# EAGLE board GroundStationCR (EAGLE 7.7.0)
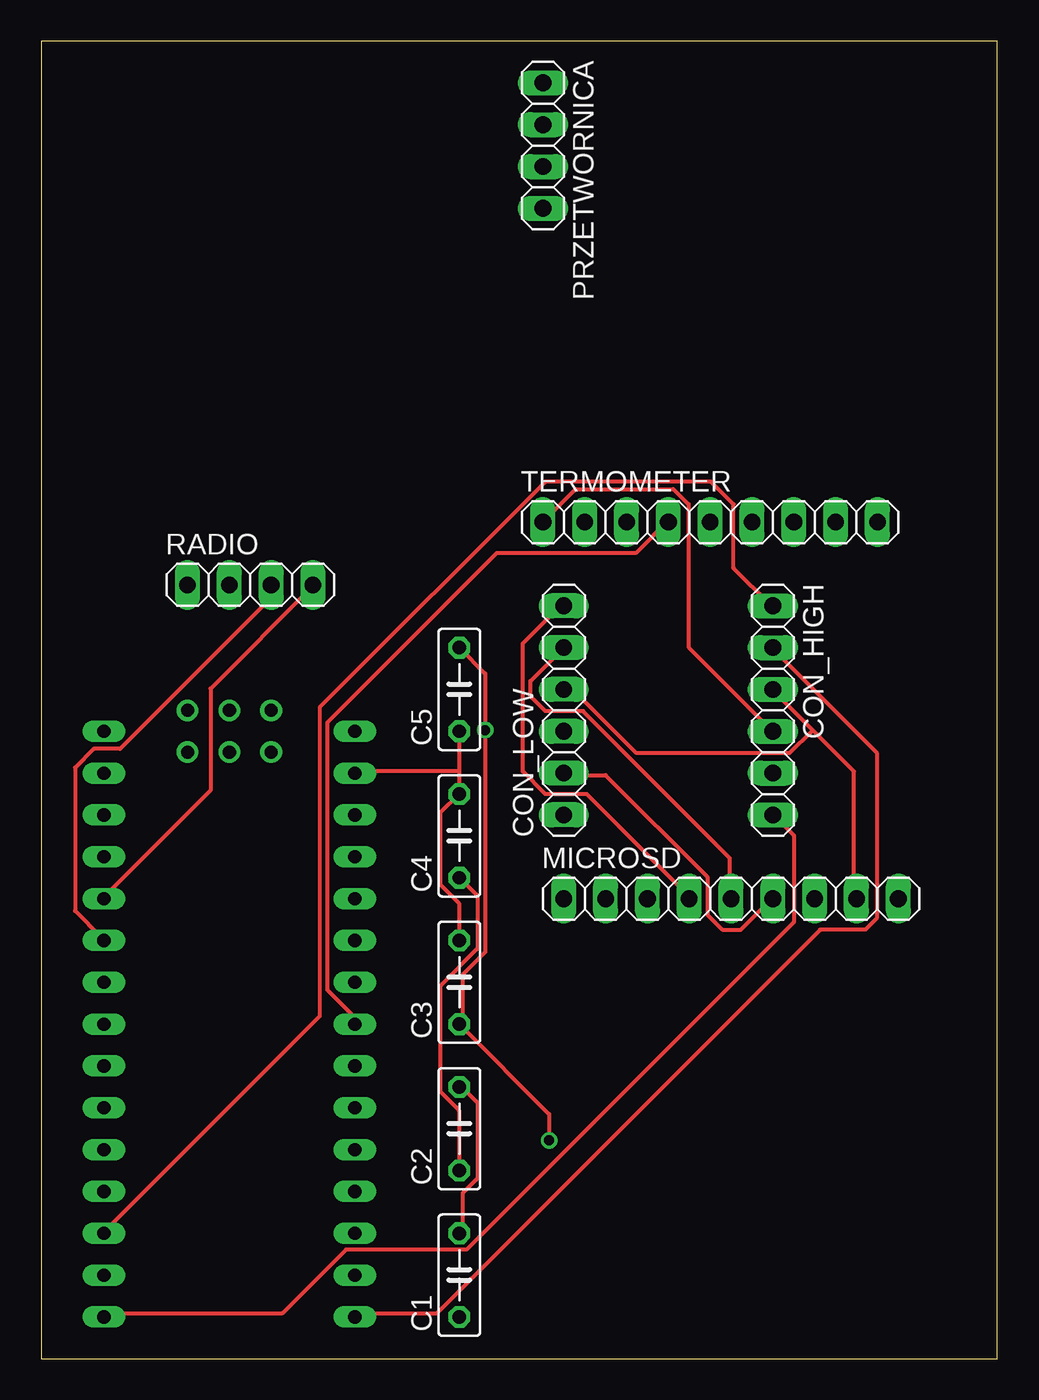
[diagram p0: board, top side]
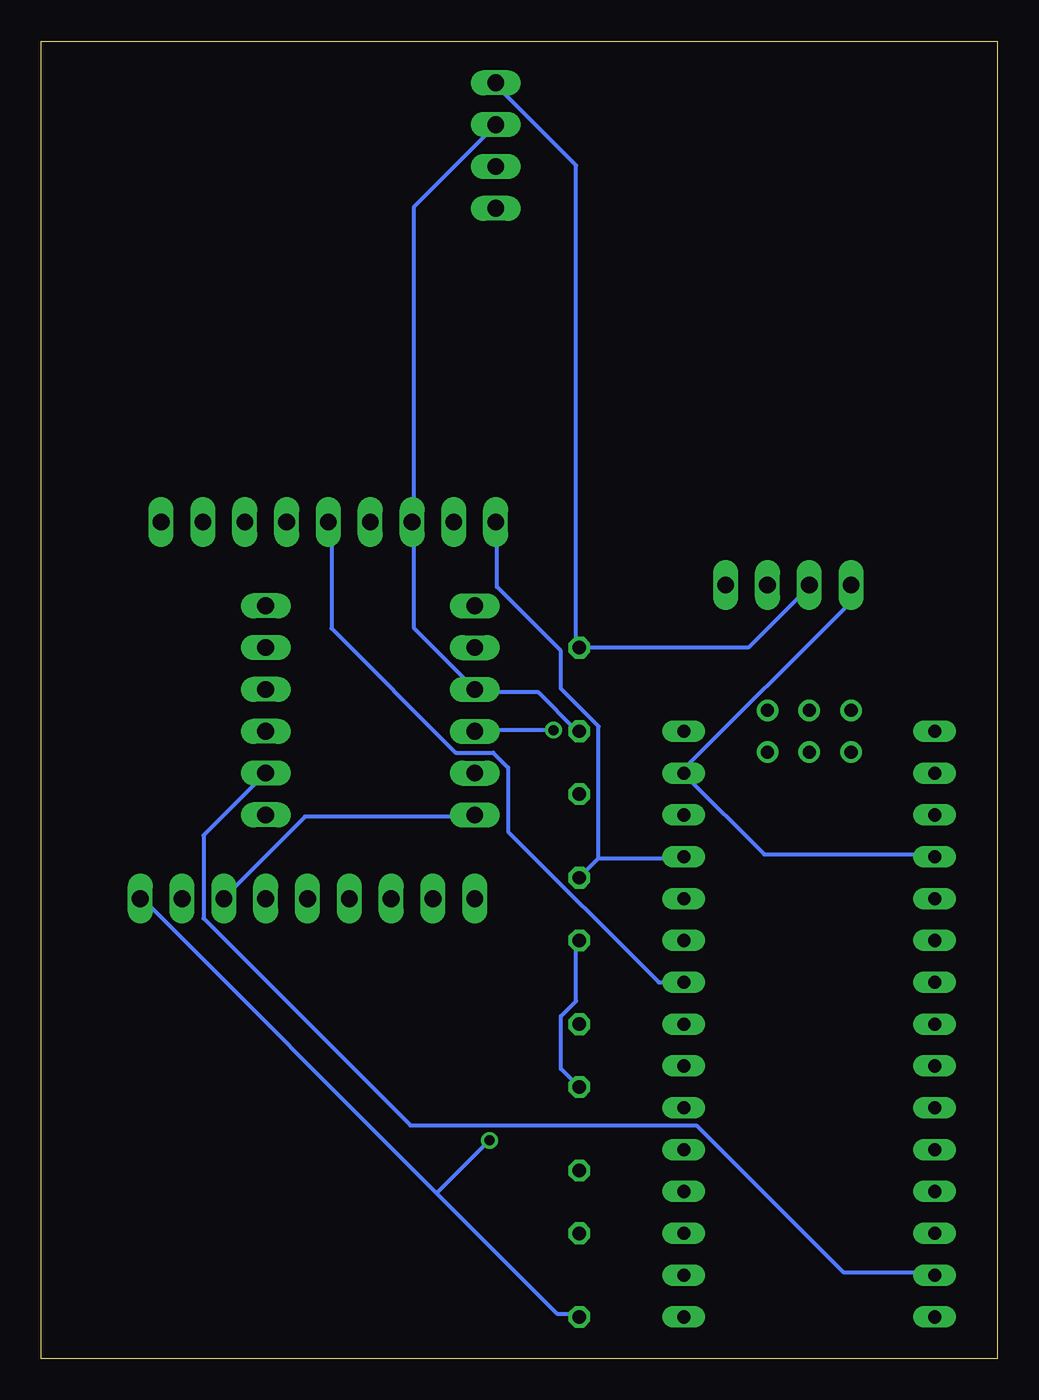
[diagram p1: board, bottom side, seen from below]

Size 58.09 x 80 mm. Coordinates in mm from the lower left corner, seen from the top.
Outline: 0,0 58.09,0 58.09,80 0,80 0,0
Copper layers (1*16): Top 0.035mm / dielectric 1.5mm / Bottom 0.035mm
Design rules "default": minimum track width 10mil, minimum drill 24mil, track to track 8mil, track to pad 8mil, pad to pad 8mil, via to via 8mil, smd to smd 8mil, copper to edge 40mil, drill to drill 8mil, minimum pad ring 10mil, minimum via ring 8mil, stop-mask expansion 4mil, vias tented up to drill 0mil, thermal gap 10mil

## Footprints (pad centres in the part's own frame; a part is rotated, then mirrored left to right if it is on the bottom)
C050-025X075 = drill 0.813 octagon: 1 -2.54,0; 2 2.54,0
1X06 = drill 1.016 long: 1 -6.35,0; 2 -3.81,0; 3 -1.27,0; 4 1.27,0; 5 3.81,0; 6 6.35,0
1X09 = drill 1.016 long: 1 -10.16,0; 2 -7.62,0; 3 -5.08,0; 4 -2.54,0; 5 0,0; 6 2.54,0; 7 5.08,0; 8 7.62,0; 9 10.16,0
1X04 = drill 1.016 long: 1 -3.81,0; 2 -1.27,0; 3 1.27,0; 4 3.81,0
NANO = drill 0.8 long: 3.3V -10.16,24.13; 5V -10.16,-1.27; A0 -10.16,19.05; A1 -10.16,16.51; A2 -10.16,13.97; A3 -10.16,11.43; A4 -10.16,8.89; A5 -10.16,6.35; A6 -10.16,3.81; A7 -10.16,1.27; AREF -10.16,21.59; D2 5.08,1.27; D3 5.08,3.81; D4 5.08,6.35; D5 5.08,8.89; D6 5.08,11.43; D7 5.08,13.97; D8 5.08,16.51; D9 5.08,19.05; D10 5.08,21.59; D11 5.08,24.13; D12 5.08,26.67; D13 -10.16,26.67; GND -10.16,-6.35; GND1 5.08,-1.27; RAW -10.16,-8.89; RST -10.16,-3.81; RST1 5.08,-3.81; RX1 5.08,-6.35; TX0 5.08,-8.89 | drill 0.8: ICSP1 -5.08,-10.16; ICSP2 -5.08,-7.62; ICSP3 -2.54,-10.16; ICSP4 -2.54,-7.62; ICSP5 0,-10.16; ICSP6 0,-7.62

## Placement (x,y rotation side)
C1  [C050-025X075]  25.4,5.08 90 top
C2  [C050-025X075]  25.4,13.97 90 top
C3  [C050-025X075]  25.4,22.86 90 top
C4  [C050-025X075]  25.4,31.75 90 top
C5  [C050-025X075]  25.4,40.64 90 top
CON_HIGH  [1X06]  44.45,39.37 270 top
CON_LOW  [1X06]  31.75,39.37 90 top
MICROSD  [1X09]  41.91,27.94 0 top
PRZETWORNICA  [1X04]  30.48,73.66 270 top
RADIO  [1X04]  12.7,46.99 0 top
TERMOMETER  [1X09]  40.64,50.8 0 top
U$1  NANO  [NANO]  8.89,29.21 180 top

## Library data of the parts
C1-C5 = resistor
CON_HIGH CON_LOW MICROSD PRZETWORNICA RADIO TERMOMETER = pinhead
U$1 = Arduino-clone

## Nets
3.3V: C1.1 C3.1 C5.2 CON_LOW.3 MICROSD.9 PRZETWORNICA.1 RADIO.2
+5V: C2.1 C4.1 CON_HIGH.4 TERMOMETER.1 U$1.5V
CS: CON_HIGH.1 U$1.D10
CS_L: CON_LOW.6 MICROSD.4
GND: C1.2 C2.2 C3.2 C4.2 C5.1 CON_HIGH.3 CON_LOW.4 MICROSD.8 PRZETWORNICA.2 RADIO.1 TERMOMETER.3 U$1.GND U$1.GND1
MISO: CON_HIGH.6 U$1.D12
MISO_L: CON_LOW.1 MICROSD.7
MOSI: CON_HIGH.5 U$1.D11
MOSI_L: CON_LOW.2 MICROSD.6
RX: RADIO.3 U$1.D3
SCL: TERMOMETER.5 U$1.A5
SCLK: CON_HIGH.2 U$1.D13
SCLK_L: CON_LOW.5 MICROSD.5
SDA: TERMOMETER.4 U$1.A4
TX: RADIO.4 U$1.D2
VIN: PRZETWORNICA.3

## Tracks (layer width: path | path; a pad name or v marks a point on that pad's centre or on a via)
3.3V  (via drill 0.61)
  Top 0.254: C5.2 26.98,41.6 v26.98,38.18 26.98,24.69 25.6,23.32 25.6,20.34 C3.1 30.86,14.86 v30.86,13.26
  Bottom 0.254: 34.06,10.06 51.89,27.89 MICROSD.9 | 34.06,10.06 26.75,2.74 25.6,2.74 C1.1 | RADIO.2 11.43,46.86 15.09,43.2 25.38,43.2 C5.2 25.6,43.2 25.6,72.47 30.4,77.27 PRZETWORNICA.1 | v26.98,38.18 31.55,38.18 CON_LOW.3 | v30.86,13.26 34.06,10.06
+5V
  Top 0.254: C2.1 25.38,11.43 25.38,15.09 24.23,16.23 24.23,22.63 26.52,24.92 26.52,28.12 25.6,29.03 C4.1 | CON_HIGH.4 44.35,38.18 39.32,43.2 39.32,51.89 38.41,52.81 32.46,52.81 30.63,50.98 TERMOMETER.1
  Bottom 0.254: 24.23,30.4 19.2,30.4 U$1.5V | 24.23,30.4 25.38,29.26 C4.1 | 24.23,30.4 24.23,38.41 26.52,40.69 26.52,42.98 30.4,46.86 30.4,50.75 TERMOMETER.1
CS
  Top 0.254: U$1.D10 3.89,7.77 16.92,20.8 16.92,39.55 30.63,53.26 40.69,53.26 42.06,51.89 42.06,48.01 44.35,45.72 CON_HIGH.1
CS_L
  Top 0.254: CON_LOW.6 31.55,45.72 29.26,43.43 29.26,35.66 30.63,34.29 33.15,34.29 39.32,28.12 MICROSD.4
GND
  Top 0.254: 46.86,38.18 49.38,35.66 49.38,28.12 MICROSD.8 | 46.86,38.18 44.58,40.46 CON_HIGH.3 | C1.2 25.6,7.77 25.6,10.06 26.52,10.97 26.52,15.54 25.6,16.46 C2.2 | 25.38,35.66 25.38,37.95 C5.1 | 25.38,35.66 25.38,34.29 | 25.38,34.29 24.23,33.15 24.23,28.8 25.38,27.66 25.38,25.6 C3.2 | 25.38,34.29 C4.2 | 46.86,38.18 45.49,36.8 36.12,36.8 32.46,40.46 31.77,40.46 CON_LOW.4 | 25.38,35.66 19.2,35.66 U$1.GND
  Bottom 0.254: U$1.GND1 3.89,30.63 14.17,30.63 18.97,35.43 U$1.GND 19.2,35.66 8.91,45.95 8.91,46.86 RADIO.1 | C3.2 25.6,25.38 25.6,21.72 26.52,20.8 26.52,17.6 25.6,16.69 C2.2 | C5.1 25.6,38.18 27.89,40.46 31.55,40.46 CON_LOW.4 31.77,40.69 35.43,44.35 35.43,50.75 TERMOMETER.3 35.43,50.98 35.43,69.95 30.63,74.75 PRZETWORNICA.2
MISO
  Top 0.254: U$1.D12 3.89,2.74 14.63,2.74 18.52,6.63 25.83,6.63 45.72,26.52 45.72,31.77 44.58,32.92 CON_HIGH.6
MISO_L
  Bottom 0.254: MICROSD.7 46.86,28.12 42.06,32.92 31.77,32.92 CON_LOW.1
MOSI
  Bottom 0.254: CON_HIGH.5 48.23,31.77 48.23,26.75 35.66,14.17 18.29,14.17 9.37,5.26 3.89,5.26 U$1.D11
MOSI_L
  Top 0.254: MICROSD.6 44.35,27.89 42.52,26.06 41.38,26.06 40.46,26.98 40.46,29.26 34.29,35.43 31.77,35.43 CON_LOW.2
RX
  Top 0.254: U$1.D3 3.66,25.6 2.06,27.2 2.06,35.89 3.2,37.03 4.8,37.03 13.95,46.18 13.95,46.86 RADIO.3
SCL
  Bottom 0.254: U$1.A5 20.57,22.86 29.72,32 29.72,35.89 30.63,36.8 32.92,36.8 40.46,44.35 40.46,50.75 TERMOMETER.5
SCLK
  Top 0.254: U$1.D13 19.2,2.74 24,2.74 47.32,26.06 50.06,26.06 50.75,26.75 50.75,36.8 44.58,42.98 CON_HIGH.2
SCLK_L
  Top 0.254: CON_LOW.5 29.72,41.15 29.72,40.23 30.63,39.32 32.92,39.32 41.83,30.4 41.83,28.12 MICROSD.5
SDA
  Top 0.254: U$1.A4 18.97,20.34 18.97,20.8 17.37,22.4 17.37,38.63 27.66,48.92 36.12,48.92 37.95,50.75 TERMOMETER.4
TX
  Top 0.254: U$1.D2 3.89,28.12 10.29,34.52 10.29,40.69 16.46,46.86 RADIO.4